# EAGLE board MyTinyCamel (EAGLE 6.5.0)
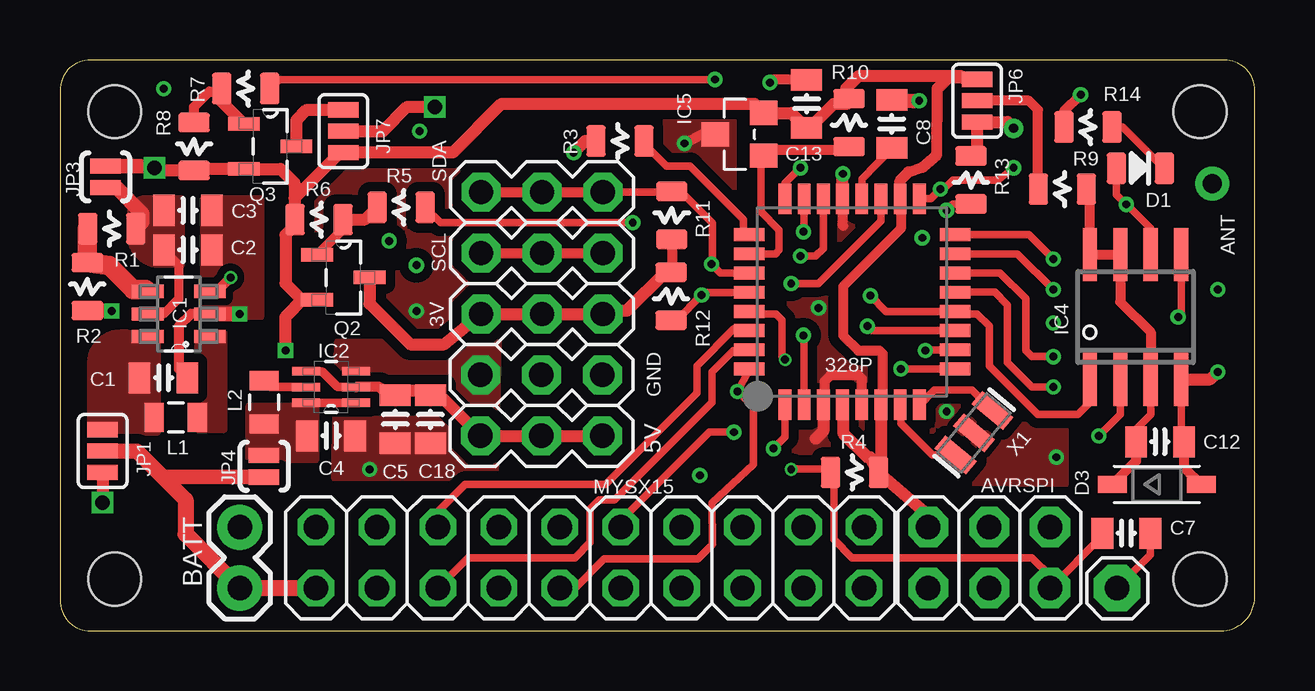
[diagram p0: board, top side]
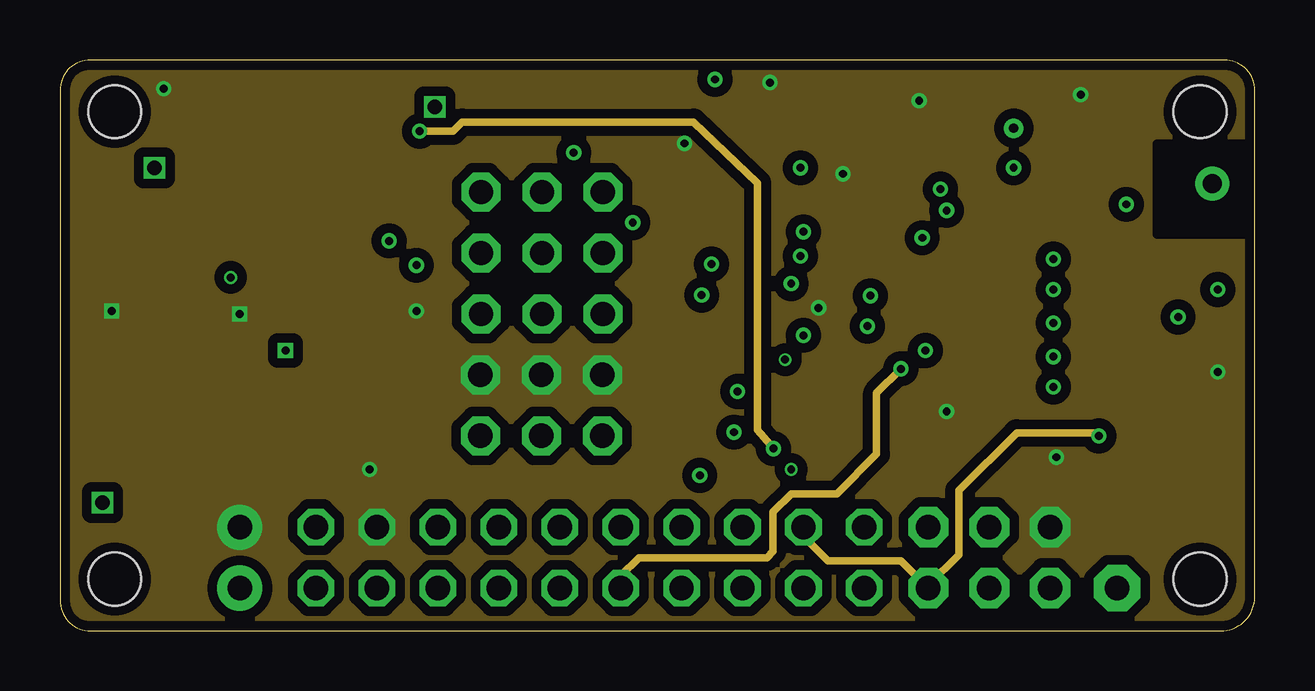
[diagram p1: board, inner layer Route2]
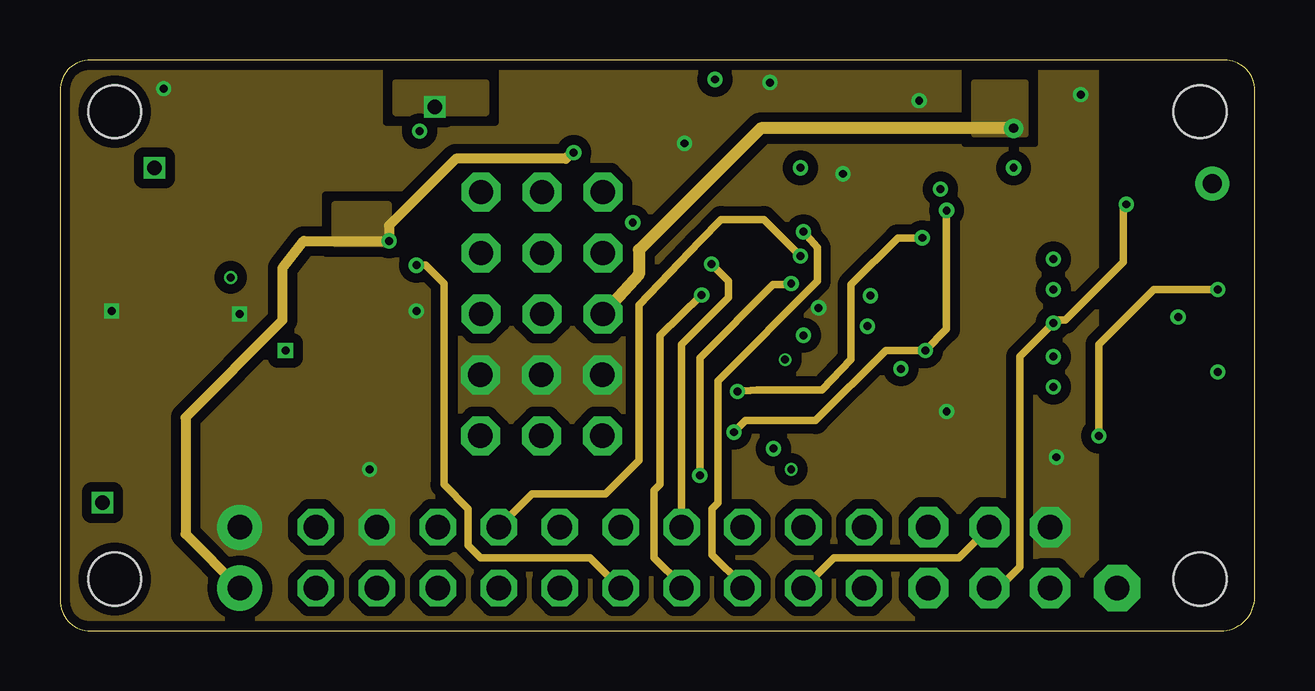
[diagram p2: board, inner layer Route15]
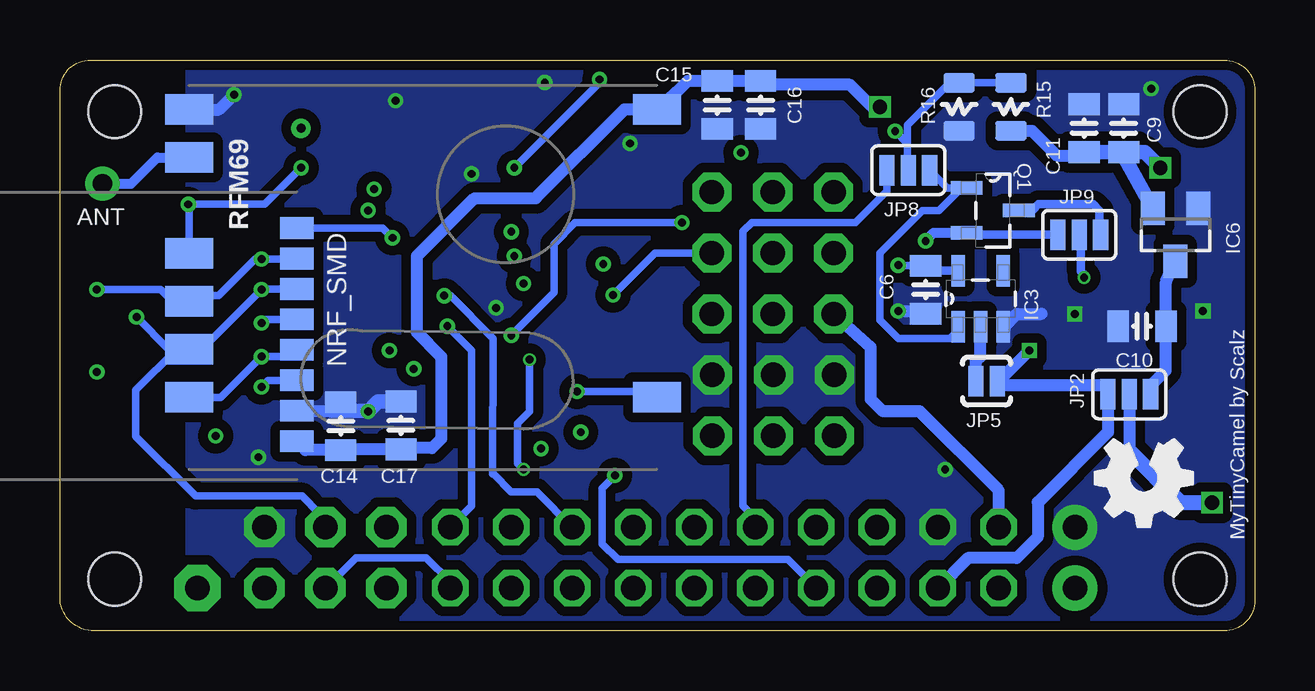
[diagram p3: board, bottom side, seen from below]

Size 49.8 x 23.81 mm. Coordinates in mm from the lower left corner, seen from the top.
Outline: 49.8,1.28 49.8,22.54 arc90 48.53,23.81 1.27,23.81 arc90 0,22.54 0,1.28 arc90 1.27,0.01 48.24,0.01 arc90 49.8,1.28
Copper layers (1*2*15*16): Top 0.035mm / dielectric 0.2mm / Route2 0.0175mm / dielectric 0.3mm / Route15 0.0175mm / dielectric 0.2mm / Bottom 0.035mm
Design rules "SeeedStudio_4layer_DRU_no_angle_20140221": minimum track width 8mil, minimum drill 12mil, track to track 8mil, track to pad 8mil, pad to pad 8mil, via to via 8mil, smd to smd 0mil, copper to edge 10mil, drill to drill 8mil, minimum pad ring 6mil, minimum via ring 4mil, stop-mask expansion 4mil, vias tented up to drill 100mil, thermal gap 10mil
Net classes: 1 power: width 0.381 mm, clearance 0.254 mm
Holes 2.2 mm at 2.28,21.65 47.52,21.65 2.28,2.16 47.52,2.16

## Footprints (pad centres in the part's own frame; a part is rotated, then mirrored left to right if it is on the bottom)
1X03 = drill 1.016 pad 1.626 octagon: 1 0,0; 2 2.54,0; 3 5.08,0
TQFP32-08 = smd 1.27 x 0.533: 1 -4.293,2.8; 2 -4.293,2; 3 -4.293,1.2; 4 -4.293,0.4; 5 -4.293,-0.4; 6 -4.293,-1.2; 7 -4.293,-2; 8 -4.293,-2.8; 17 4.293,-2.8; 18 4.293,-2; 19 4.293,-1.2; 20 4.293,-0.4; 21 4.293,0.4; 22 4.293,1.2; 23 4.293,2; 24 4.293,2.8 | smd 0.533 x 1.27: 9 -2.8,-4.293; 10 -2,-4.293; 11 -1.2,-4.293; 12 -0.4,-4.293; 13 0.4,-4.293; 14 1.2,-4.293; 15 2,-4.293; 16 2.8,-4.293; 25 2.8,4.293; 26 2,4.293; 27 1.2,4.293; 28 0.4,4.293; 29 -0.4,4.293; 30 -1.2,4.293; 31 -2,4.293; 32 -2.8,4.293
RFM12B-ANTENNA = drill 0.8 pad 1.422: P$1 0,0
2X03 = drill 1.016 pad 1.676 octagon: 1 -2.54,-1.27; 2 -2.54,1.27; 3 0,-1.27; 4 0,1.27; 5 2.54,-1.27; 6 2.54,1.27
1X02 = drill 1.016 pad 1.88: 1 0,0; 2 2.54,0
0805-CAP = smd 0.902 x 1.3: 1 -1,0; 2 1,0
0805-LED = smd 0.8 x 1.3: MINUS -1,0; PLUS 1,0
SOD-123 = smd 1.2 x 0.7: A 1.85,0; C -1.85,0
1X01 = drill 1.016 pad 1.93 octagon: 1 0,0
SOT95P270X145-6N = smd 1.321 x 0.559: 1 -1.295,0.94; 2 -1.295,0; 3 -1.295,-0.94; 4 1.295,-0.94; 5 1.295,0; 6 1.295,0.94
SOT65P210X110-6N = smd 1.168 x 0.356: 1 -1.041,0.66; 2 -1.041,0; 3 -1.041,-0.66; 4 1.041,-0.66; 5 1.041,0; 6 1.041,0.66
NCP302LSN20T1 = smd 1.321 x 0.559: CD 1.168,0.94; GND -1.168,-0.94; IN -1.168,0; NC 1.168,-0.94; RST -1.168,0.94
SO-08 = smd 0.6 x 2.2: 1 -1.905,-2.6; 2 -0.635,-2.6; 3 0.635,-2.6; 4 1.905,-2.6; 5 1.905,2.6; 6 0.635,2.6; 7 -0.635,2.6; 8 -1.905,2.6
SOT23 = smd 1.016 x 1.143: 1 -0.889,-1.016; 2 0.889,-1.016; 3 0,1.016
SOT23' = smd 1 x 1.4: 1 -0.95,-1.1; 2 0.95,-1.1; 3 0,1.1
SJ_3 = smd 0.635 x 1.27: 1 -0.889,0; 2 0,0; 3 0.889,0
SJ_2S-NO = smd 0.635 x 1.27: 1 -0.45,0; 2 0.45,0
0805 = smd 0.8 x 1.2: 1 -0.9,0; 2 0.9,0
2X10 = drill 1.016 octagon: 1 -11.43,-1.27; 2 -11.43,1.27; 3 -8.89,-1.27; 4 -8.89,1.27; 5 -6.35,-1.27; 6 -6.35,1.27; 7 -3.81,-1.27; 8 -3.81,1.27; 9 -1.27,-1.27; 10 -1.27,1.27; 11 1.27,-1.27; 12 1.27,1.27; 13 3.81,-1.27; 14 3.81,1.27; 15 6.35,-1.27; 16 6.35,1.27; 17 8.89,-1.27; 18 8.89,1.27; 19 11.43,-1.27; 20 11.43,1.27
NRF24L01+SMD_MODULE = smd 0.9 x 1.4: 3V -4.8,-9.6; CE -2.26,-9.6; CSN -0.99,-9.6; GND -3.53,-9.6; IRQ 4.09,-9.6; MISO 2.82,-9.6; MOSI 1.55,-9.6; SCK 0.28,-9.6
SOT95P237X112-3N = smd 1.321 x 0.559: 1 -1.092,0.94; 2 -1.092,-0.94; 3 1.092,0
0805-RES = smd 0.8 x 1.3: 1 -1,0; 2 1,0
RFM69W-MINPADS = smd 2 x 1.27: ANA 8,-5; DIO0 -11.5,5; GND 8,-7; MISO 8,1; MOSI 8,3; NSS 8,5; SCK 8,-1; VDD -11.5,-7
RESONATOR-SMD = smd 0.7 x 1.7: 1 -1.2,0; 2 0,0; 3 1.2,0

## Placement (x,y rotation side)
3V  [1X03]  17.55,13.22 0 top
5V  [1X03]  17.53,8.14 0 top
328P  ATMega-328  [TQFP32-08]  33.02,13.72 90 top
ANT  RFM12B_ANTENNA  [RFM12B-ANTENNA]  48.03,18.65 0 top
AVRSPI  AVRSPI  [2X03]  38.73,3.06 0 top
BATT  M02PTH  [1X02]  7.49,1.79 90 top
C1  4.7u  [0805-CAP]  4.32,10.55 0 top
C2  10n  [0805-CAP]  5.33,15.88 0 top
C3  [0805-CAP]  5.33,17.53 0 top
C4  10u  [0805-CAP]  11.3,8.14 0 top
C5  10u  [0805-CAP]  13.97,8.82 270 top
C6  33n  [0805-CAP]  13.72,14.23 270 bottom
C7  0.1  [0805-CAP]  44.45,4.07 180 top
C8  0.1  [0805-CAP]  34.67,21.14 90 top
C9  0.1  [0805-CAP]  5.46,20.96 90 bottom
C10  1u  [0805-CAP]  4.7,12.71 180 bottom
C11  10u  [0805-CAP]  7.11,20.96 90 bottom
C12  100n  [0805-CAP]  45.85,7.88 0 top
C13  100n  [0805-CAP]  31.11,21.98 270 top
C14  4u7  [0805-CAP]  38.1,8.54 270 bottom
C15  4u7  [0805-CAP]  22.4,21.93 90 bottom
C16  0.1u  [0805-CAP]  20.6,21.93 90 bottom
C17  0.1u  [0805-CAP]  35.59,8.57 270 bottom
C18  0.1u  [0805-CAP]  15.44,8.82 270 top
D1  LED0805  [0805-LED]  45.03,19.29 180 top
D3  BZT52H-B3V6  [SOD-123]  45.72,6.1 0 top
DTR  [1X01]  44.07,1.79 0 top
GND  [1X03]  17.53,10.68 0 top
IC1  MCP1640T-I/CHY  [SOT95P270X145-6N]  4.95,13.22 180 top
IC2  TPS61222DCKT  [SOT65P210X110-6N]  11.3,10.17 180 top
IC3  NCP302LSN20T1  [NCP302LSN20T1]  11.43,13.85 90 bottom
IC4  AT25DF512C-SSHN-B  [SO-08]  44.83,13.09 0 top
IC5  ATSHA204A  [SOT23]  28.32,20.71 90 top
IC6  MCP1703CB  [SOT23']  3.3,16.52 180 bottom
JP1  JUMPER-3SMD  [SJ_3]  1.78,7.5 270 top
JP2  JUMPER-3SMD  [SJ_3]  5.23,9.86 180 bottom
JP3  [SJ_2S-NO]  1.91,18.93 90 top
JP4  [SJ_2S-NO]  8.51,6.87 270 top
JP5  [SJ_2S-NO]  11.18,10.42 0 bottom
JP6  JUMPER-3SMD  [SJ_3]  38.23,22.11 90 top
JP7  JUMPER-3SMD  [SJ_3]  11.81,20.84 270 top
JP8  JUMPER-3SMD  [SJ_3]  14.44,19.21 180 bottom
JP9  JUMPER-3SMD  [SJ_3]  7.32,16.52 180 bottom
L1  4.7uH  [0805]  4.83,8.9 0 top
L2  4.7uH  [0805]  8.51,9.53 90 top
MYSX15  MYSXConnector 1.5  [2X10]  22.1,3.06 0 top
NRF_SMD  NRF24L01+SMD_MODULE  [NRF24L01+SMD_MODULE]  49.53,12.71 90 bottom
Q1  cj2305  [SOT95P237X112-3N]  10.92,17.53 0 bottom
Q2  SI2399DS-T1-GE3  [SOT95P237X112-3N]  11.81,14.74 0 top
Q3  SI2399DS-T1-GE3  [SOT95P237X112-3N]  8.76,20.2 0 top
R1  976k  [0805-RES]  2.16,16.77 0 top
R2  562k  [0805-RES]  1.14,14.36 270 top
R3  [0805-RES]  23.34,20.43 0 top
R4  10k  [0805-RES]  33.12,6.61 0 top
R5  100  [0805-RES]  14.22,17.66 180 top
R6  10k  [0805-RES]  10.79,17.15 180 top
R7  100  [0805-RES]  7.75,22.61 180 top
R8  10k  [0805-RES]  5.59,20.2 270 top
R9  100  [0805-RES]  41.78,18.42 180 top
R10  56k  [0805-RES]  32.89,21.19 90 top
R11  4k7  [0805-RES]  25.5,17.33 270 top
R12  4k7  [0805-RES]  25.48,13.95 90 top
R13  10k  [0805-RES]  37.97,18.8 90 top
R14  330  [0805-RES]  42.85,21.01 180 top
R15  10k  [0805-RES]  10.16,21.85 270 bottom
R16  10k  [0805-RES]  12.32,21.85 270 bottom
RFM69  RFM69  [RFM69W-MINPADS]  36.42,14.74 180 bottom
SCL  [1X03]  17.55,15.76 0 top
SDA  [1X03]  17.55,18.3 0 top
X1  8 MHz  [RESONATOR-SMD]  38.1,8.26 50.2 top

## Library data of the parts
3V 5V BATT GND SCL SDA = SparkFun-Connectors
328P ANT C1-C18 D1 R1-R16 RFM69 = LowPowerLab
AVRSPI MYSX15 = pinhead
D3 DTR = adafruit
IC1 = pmo_lib; MPN: MCP1640BT-I/CHY; OC_FARNELL: 1800207; OC_NEWARK: 73R3625; PACKAGE: SOT-6; SUPPLIER: Microchip
IC2 = pmo_lib; MPN: TPS61222DCKT; OC_FARNELL: 1755643; OC_NEWARK: 94T5101; PACKAGE: SC70-6; SUPPLIER: Texas Instruments
IC3 NRF_SMD = pmo_lib
IC4 = microchip; MF: MICROCHIP; MPN: 25AA080/SN; OC_FARNELL: 1816072; OC_NEWARK: 92C7351
IC5 = Sensor_tbowmo
IC6 = linear
JP1-JP9 L1 L2 = SparkFun-Passives
Q1-Q3 = pmo_lib; MPN: SI2399DS-T1-GE3; OC_FARNELL: 2056681; OC_NEWARK: 64T4058; PACKAGE: SOT-23-3; SUPPLIER: VISHAY SILICONIX
X1 = SparkFun

## Nets
A0: 328P.23 MYSX15.15
A1: 328P.24 R7.1
A2: 328P.25 R3.2
A3: 328P.26 IC5.1 R10.1
ADC1: 328P.19 MYSX15.7
ADC2: 328P.22 MYSX15.8
AREF: 328P.20 C8.1
D2: 328P.32 MYSX15.9 NRF_SMD.IRQ RFM69.DIO0
D3: 328P.1 JP8.2 R15.1 R16.1
D4: 328P.2 R5.1
D5: 328P.9 C6.1 IC3.CD MYSX15.11
D6: 328P.10 MYSX15.12 R13.1
D7: 328P.11 MYSX15.20
D9: 328P.13 NRF_SMD.CE
D10: 328P.14 NRF_SMD.CSN RFM69.NSS
DTR: C7.1 DTR.1
EN_BOOST: IC1.3 JP9.2
FLASH_CSN: 328P.12 IC4.1 MYSX15.16
GND: 328P.3 328P.5 328P.21 AVRSPI.6 BATT.2 C1.2 C2.2 C3.2 C4.2 C5.2 C6.2 C8.2 C9.2 C10.2 C11.2 C12.2 C13.1 C14.1 C15.1 C16.1 C17.1 C18.2 D3.A GND.1 GND.2 GND.3 IC1.2 IC2.3 IC3.GND IC4.4 IC5.3 IC6.1 MYSX15.4 NRF_SMD.GND R2.2 R14.2 R16.2 RFM69.GND X1.2
INT2: JP8.3 MYSX15.10
INT_BOOST: IC3.RST JP8.1 Q1.1
MISO: 328P.16 AVRSPI.1 IC4.2 MYSX15.18 NRF_SMD.MISO RFM69.MISO
MOSI: 328P.15 AVRSPI.4 IC4.5 MYSX15.17 NRF_SMD.MOSI RFM69.MOSI
N$1: IC1.1 L1.2
N$2: ANT.P$1 RFM69.ANA
N$3: IC3.IN JP5.1
N$4: IC1.4 R1.1 R2.1
N$5: JP6.2 R9.2
N$6: C12.1 D3.C IC4.3 IC4.7 IC4.8 R9.1
N$7: Q2.1 R5.2 R6.1
N$8: C2.1 C3.1 IC1.5 JP3.1 R1.2
N$9: 328P.7 X1.1
N$10: IC2.5 L2.2
N$12: D1.MINUS R14.1
N$13: C4.1 IC2.1 IC2.6 JP4.1 L2.1
N$15: JP1.3 JP2.2
N$18: Q3.1 R7.2 R8.1
N$21: 328P.8 X1.3
Q_NCP: JP9.1 Q1.3
RST: 328P.29 AVRSPI.5 C7.2 R4.1
RX: 328P.30 MYSX15.6
SCK: 328P.17 AVRSPI.3 D1.PLUS IC4.6 MYSX15.19 NRF_SMD.SCK RFM69.SCK
SCL: 328P.28 MYSX15.13 R12.1 SCL.1 SCL.2 SCL.3
SDA: 328P.27 MYSX15.14 R11.1 SDA.1 SDA.2 SDA.3
TX: 328P.31 MYSX15.5
V+5: 5V.1 5V.2 5V.3 C5.1 C18.1 IC2.2 IC2.4
VCC: 328P.4 328P.6 328P.18 AVRSPI.2 C9.1 C11.1 C13.2 IC5.2 IC6.2 JP2.3 JP3.2 JP5.2 JP6.3 JP7.3 MYSX15.3 Q2.2 Q3.2 R4.2 R6.2 R8.2 R10.2 R15.2
VCC_RF: JP7.1 Q3.3
VCC_SENSORS: 3V.1 3V.2 3V.3 JP6.1 MYSX15.2 Q2.3 R11.2 R12.2 R13.2
VCCRF: C14.2 C15.2 C16.2 C17.2 JP7.2 NRF_SMD.3V RFM69.VDD
VIN: BATT.1 JP1.2 JP4.2 JP9.3 MYSX15.1 Q1.2 R3.1
VIN2: C1.1 IC1.6 JP1.1 L1.1
VREG [power]: C10.1 IC6.3 JP2.1

## Tracks (layer width: path | path; a pad name or v marks a point on that pad's centre or on a via)
A0  (via drill 0.33 pad 0.64)
  Top 0.305: 328P.23 31.02,16.68 v30.99,16.64
  Route15 0.305: MYSX15.15 28.45,1.91 27.18,3.18 27.18,5.09 27.43,5.34 27.43,10.42 31.57,14.59 31.57,15.98 v30.99,16.64
A1  (via drill 0.33 pad 0.64)
  Top 0.305: 328P.24 30.22,18.67 v30.86,19.31 | v27.3,22.99 9.13,22.99 R7.1
  Bottom 0.305: v27.3,22.99 27.3,22.87 v30.86,19.31
A2
  Top 0.305: 28.61,16.64 328P.25 28.5,16.75 28.5,17.15 26.26,19.39 25.27,19.39 24.34,20.32 R3.2
A3
  Top 0.305: 328P.26 29.81,15.72 29.97,15.88 29.97,16.72 29.21,17.48 29.21,20.07 IC5.1
  Top 0.406: IC5.1 29.59,19.82 29.84,20.07 32.88,20.07 R10.1
ADC1  (via drill 0.33 pad 0.64)
  Top 0.305: 328P.19 34.22,17.08 31.62,14.49 v30.48,14.49
  Route15 0.305: v26.67,6.48 26.67,11.39 29.72,14.43 30.43,14.43 v30.48,14.49
  Bottom 0.305: MYSX15.7 18.29,1.81 19.46,2.98 26.54,2.98 27.2,3.64 27.2,5.95 v26.67,6.48
ADC2  (via drill 0.33 pad 0.64)
  Top 0.305: 328P.22 31.82,15.95 31.5,15.63 v30.86,15.63
  Route15 0.305: MYSX15.8 19.68,5.72 22.73,5.72 24.13,7.12 24.13,13.6 26.67,16.26 27.56,17.15 29.34,17.15 v30.86,15.63
AREF
  Top 0.305: 328P.20 33.42,18.84 C8.1
D2  (via drill 0.33 pad 0.64)
  Top 0.305: 328P.32 28.73,10.85 v28.25,9.99 28.91,9.35 28.91,6.94 27.18,5.34 27.2,3.61 26.59,3 22.68,3 21.46,1.79 MYSX15.9
  Route15 0.305: v35.94,16.39 34.92,16.39 32.97,14.43 32.97,11.31 31.75,10.04 29.06,10.04 v28.25,9.99
  Bottom 0.305: RFM69.DIO0 25.4,9.74 | NRF_SMD.IRQ 36.35,16.8 v35.94,16.39 | 25.65,9.49 25.4,9.74 | 25.4,9.74 25.4,9.46 | 25.3,10.12 25.17,9.99 | 24.64,9.45 RFM69.DIO0 | v28.25,9.99 25.17,9.99 | 25.17,9.99 RFM69.DIO0
D3  (via drill 0.33 pad 0.64)
  Top 0.305: 30.22,9.15 30.22,8.08 v29.74,7.6
  Top 0.406: 328P.1 30.22,9.15
  Route2 0.305: v14.99,20.84 16.38,20.84 16.76,21.22 26.42,21.22 29.08,18.68 29.08,8.39 v29.74,7.6
  Bottom 0.305: 14.48,20.33 14.48,21.09 12.72,22.85 R16.1 R15.1 | 14.48,20.33 14.48,19.25 JP8.2 | v14.99,20.84 14.48,20.33
D4  (via drill 0.33 pad 0.64)
  Top 0.305: 15.37,17.15 R5.1 15.86,17.03 v23.88,17.03 | 30.99,9.4 328P.2 31.02,12.29 v30.99,12.33
  Bottom 0.305: v30.99,12.33 29.21,14.1 29.21,16.14 28.32,17.03 v23.88,17.03
D5  (via drill 0.33 pad 0.64)
  Top 0.305: 328P.9 35.95,10.92 v35.05,10.93
  Route2 0.305: MYSX15.11 23.37,2.29 24.13,3.06 29.46,3.06 29.72,3.31 29.72,4.96 30.48,5.72 32.38,5.72 34.04,7.37 34.04,9.91 v35.05,10.93
  Route15 0.305: v14.86,15.25 15.24,15.25 16,14.49 16,6.1 17.02,5.09 17.02,3.56 17.53,3.06 22.1,3.06 MYSX15.11
  Bottom 0.305: C6.1 14.84,15.23 v14.86,15.25
  Bottom 0.356: IC3.CD 13.5,15.02 C6.1
D6  (via drill 0.33 pad 0.64)
  Top 0.305: 328P.10 36.1,11.72 v36.07,11.69 | R13.1 37.23,17.8 v36.96,17.53 | v28.09,8.29 27.08,8.29 23.75,4.96 23.75,4.71 MYSX15.12
  Route15 0.305: v36.96,17.53 36.96,12.58 v36.07,11.69 34.42,11.69 31.5,8.77 28.57,8.77 v28.09,8.29
D7  (via drill 0.33 pad 0.64)
  Top 0.305: 328P.11 33.84,12.52 v33.66,12.71
  Bottom 0.305: MYSX15.20 32.64,5.21 32.64,11.69 v33.66,12.71
D9  (via drill 0.33 pad 0.64)
  Top 0.305: 37.29,14.1 328P.13 38.97,14.12 39.5,13.6 39.5,11.18 40.51,10.17 v41.4,10.17
  Bottom 0.305: 39.65,10.17 NRF_SMD.CE 41.12,10.45 v41.4,10.17
D10  (via drill 0.33 pad 0.64)
  Top 0.305: 328P.14 39.19,14.92 40.26,13.85 40.26,11.69 40.51,11.44 v41.4,11.44
  Bottom 0.305: 39.9,11.69 NRF_SMD.CSN 40.21,11.44 v41.4,11.44 43.1,9.74 RFM69.NSS
DTR
  Top 0.305: C7.1 45.45,3.17 DTR.1
EN_BOOST  (via drill 0.33)
  Top 0.406: IC1.3 6.53,14.16 v7.11,14.74
  Bottom 0.356: v7.11,14.74 7.11,14.87 7.24,14.99 7.24,16.44 JP9.2
FLASH_CSN  (via drill 0.33 pad 0.64)
  Top 0.305: 328P.12 37.42,13.22 38.23,13.22 38.73,12.71 38.73,11.06 40.77,9.02 42.42,9.02 42.93,9.53 IC4.1 | 328P.12 34.44,13.32 v33.78,13.98 | 37.33,13.34 328P.12
  Bottom 0.305: 28.45,4.45 MYSX15.16 29.92,5.8 30.99,5.8 31.74,6.55 31.76,6.55 31.75,12.2 33.53,13.98 v33.78,13.98
GND  (via drill 0.33 pad 0.64)
  Top 0.305: IC4.4 46.74,8.25 C12.2
  Top 0.356: 31.88,9.49 328P.3
  Top 0.406: IC1.2 5.46,13.22 4.95,12.71 4.95,10.91 C1.2 | 328P.5 33.42,10.53 33.27,10.68 32.13,10.68 31.88,10.42 31.88,9.49 | 328P.21 32.62,16.92 32.64,16.9 | IC5.3 26.8,20.71 v26.04,20.33 | C13.1 29.7,22.98 v29.59,22.87 | C12.2 46.85,6.83 D3.A | R14.2 41.85,21.66 v42.55,22.36
  Top 0.508: 328P.21 32.62,19.04 v32.64,19.06 | 328P.3 31.82,8.33 31.5,8.01 | IC4.4 47.95,10.49 v48.26,10.8
  Top 0.61: IC1.2 v7.49,13.22 | C8.2 35.58,22.09 v35.81,22.11 | R2.2 2.14,13.36 v2.16,13.34
  Bottom 0.406: 10.39,12.58 IC3.GND
  Bottom 0.508: v14.86,13.34 13.83,13.34 C6.2 | IC3.GND 10.44,12.68 9.91,13.22 8.89,13.22 | RFM69.GND 43.16,21.74 v42.55,22.36 | NRF_SMD.GND 38.46,9.18 C14.1
  Bottom 0.61: C17.1 36.54,9.57 v36.96,9.15 36.98,9.18 38.46,9.18
  other vias: 31.62,13.47 12.9,6.74 41.53,7.25 4.32,22.61
  pour Route2 (isolate 0.406, no thermals): 1.27,23.76 48.51,23.76 arc-90 49.78,22.49 49.78,1.28 arc-90 48.51,0.01 1.27,0.01 arc-90 0,1.28 0,22.49 arc-90
  pour Top (isolate 0.305, no thermals): 5.97,18.04 8.38,18.04 8.38,13.09 5.97,13.09
  pour Bottom (isolate 0.406, no thermals): 44.45,0.01 1.27,0.01 arc-90 0,1.28 0,22.49 arc-90 1.27,23.76 44.45,23.76
  pour Top (isolate 0.406, no thermals): 11.56,12.07 18.29,12.07 18.16,6.36 11.43,6.36
  pour Top (isolate 0.406): 27.94,6.23 27.94,18.8 41.91,18.68 41.91,6.1
  pour Route15 (isolate 0.406, rank 6, no thermals): 43.18,0.01 1.27,0.01 arc-90 0,1.28 0,22.49 arc-90 1.27,23.76 43.18,23.76
  pour Top (isolate 0.406, no thermals): 9.27,23.76 28.07,23.76 28.07,12.71 9.27,12.71
INT2
  Bottom 0.305: MYSX15.10 20.83,4.71 21.34,5.21 21.34,16.67 20.95,17.03 16.64,17.03 15.33,18.33 JP8.3
INT_BOOST
  Bottom 0.305: Q1.1 12.22,18.47 | 12.22,18.47 13.16,17.53 13.84,17.53 15.62,15.76 15.62,12.96 14.86,12.2 12.7,12.2 12.37,12.53 IC3.RST | 12.22,18.47 12.81,18.47 JP8.1
MISO  (via drill 0.33 pad 0.64)
  Top 0.305: IC4.2 44.2,9.02 v43.31,8.14 | 328P.16 40.38,16.52 v41.4,15.5
  Route2 0.305: MYSX15.18 30.99,3.94 32,2.93 35.05,2.93 AVRSPI.1 36.2,1.91 37.47,3.18 37.47,5.85 39.88,8.26 43.18,8.26 v43.31,8.14
  Route15 0.305: v48.26,14.23 45.59,14.23 43.31,11.95 v43.31,8.14
  Bottom 0.305: v48.26,14.23 45.59,14.23 45.1,13.74 RFM69.MISO 44.08,13.98 43.18,13.98 41.66,15.5 v41.4,15.5 39.96,15.5 NRF_SMD.MISO
MOSI  (via drill 0.33 pad 0.64)
  Top 0.305: IC4.5 46.74,13.22 v46.61,13.09 | 328P.15 39.91,15.72 v41.4,14.23
  Route15 0.305: AVRSPI.4 37.47,3.06 32.26,3.06 MYSX15.17
  Bottom 0.305: 44.93,11.74 RFM69.MOSI 44.02,11.44 43.94,11.44 43.56,11.82 43.56,12.07 v41.4,14.23 41.38,14.26 NRF_SMD.MOSI | 44.93,11.74 45.26,11.74 v46.61,13.09 46.48,12.96 | 44.93,11.74 46.63,10.04 46.63,8.11 44.15,5.62 39.7,5.62 38.99,4.91 38.99,4.33 AVRSPI.4
N$1
  pour Top (isolate 0.381, no thermals): 6.86,12.45 5.71,12.45 5.71,8.39 6.86,8.39
N$2
  Bottom 0.406: ANT.P$1 46.84,18.65 45.74,19.74 RFM69.ANA
N$3
  Bottom 0.508: JP5.1 11.63,11.24 11.43,11.44 IC3.IN
N$4
  Top 0.406: 3.58,14.23 IC1.4
  Top 0.813: 3.58,14.23 3.05,14.23 2.05,15.23 R2.1 1.14,16.76 R1.1
N$5
  Top 0.305: 40.89,18.53 R9.2
  Top 0.406: 40.89,18.53 40.89,18.8 40.77,18.93 40.77,21.72 40.39,22.11 JP6.2
N$6
  Top 0.305: C12.1 44.85,8.41 45.47,9.02 IC4.3
  Top 0.406: R9.1 42.93,18.28 IC4.8 IC4.7 44.2,13.72 45.47,12.45 IC4.3 | C12.1 44.85,7.08 D3.C
N$7
  Top 0.406: R6.1 11.79,16.76 Q2.1
  Top 0.508: R6.1 12.72,17.15 R5.2
N$8
  Top 0.381: C2.1 4.33,15.87 4.95,15.25 4.95,13.85 4.32,13.22 IC1.5
  Top 0.61: JP3.1 2.35,18.48 3.43,17.41 3.43,17.04 R1.2
  pour Top (no thermals): 2.92,16.52 2.92,17.41 arc-90 3.56,18.04 5.08,18.04 5.08,15.25 4.19,15.25 arc-90
N$9
  Top 0.305: X1.1 36.35,7.34 35.05,8.64 35.05,9.4
  Top 0.356: 35.05,9.4 328P.7
N$10
  Top 0.356: IC2.5 8.77,10.17 L2.2
N$11
  cutout Route2 (no thermals): 49.53,20.33 45.72,20.33 45.72,16.52 49.53,16.52
N$12
  Top 0.305: R14.1 44.31,21.01 D1.MINUS
N$13
  Top 0.356: IC2.1 IC2.6
  pour Top (isolate 0.406, no thermals): 7.87,9.41 10.67,9.41 10.67,7.12 7.87,7.12
N$15  (via drill 0.6)
  Top 0.508: JP1.3 v1.78,5.34
  Bottom 0.508: JP2.2 5.23,7.5
  Bottom 0.635: v1.78,5.34 3.07,5.34 5.23,7.5
N$18
  Top 0.406: R8.1 5.59,21.85 6.22,22.49 6.62,22.49 R7.2
  Top 0.508: R7.2 6.75,22.06 Q3.1
N$21
  Top 0.305: 328P.8 35.84,9.43 36.45,10.04 38.01,10.04 X1.3
  Top 0.356: X1.3 38.58,9.18
Q_NCP
  Bottom 0.356: Q1.3 9.27,17.53 9.02,17.79 6.73,17.79 6.48,17.53 6.48,16.57 JP9.1
RST  (via drill 0.33)
  Top 0.305: 328P.29 28.29,13.32 | C7.2 43.45,3.96 AVRSPI.5 41.27,2.29 40.51,3.06 33.02,3.06 32.26,3.82 32.26,6.75 | 328P.29 28.62,13.22 29.84,13.22 30.1,12.96 30.1,11.44 v30.23,11.31 | 32.26,6.75 R4.1 | 28.75,13.34 328P.29 | 32.26,6.75 30.5,6.75 v30.48,6.74
  Bottom 0.305: v30.23,11.31 30.23,9.15 30.73,8.64 30.73,6.99 v30.48,6.74
RX
  Top 0.305: MYSX15.6 15.75,4.96 16.89,6.1 22.73,6.1 26.54,9.91 26.54,11.06 28.07,12.58 28.67,12.58 328P.30
SCK  (via drill 0.33 pad 0.64)
  Top 0.305: 328P.17 36.3,18.02 v36.7,18.42 36.83,18.42 37.21,18.8 39.12,18.8 v39.75,19.31 | IC4.6 45.47,16.77 v44.45,17.79 44.03,18.2 D1.PLUS
  Route15 0.305: v44.45,17.79 44.32,17.66 44.32,15.37 41.91,12.96 41.53,12.96 v41.4,12.83 40.01,11.44 40.01,2.67 39.12,1.79 AVRSPI.3
  Bottom 0.305: 44.32,17.66 v44.45,17.79 | RFM69.SCK 44.42,17.76 v44.45,17.79 | NRF_SMD.SCK 41.25,12.99 v41.4,12.83 | v44.45,17.79 41.27,17.79 v39.75,19.31 | MYSX15.19 33.53,2.04 34.54,3.06 37.47,3.06 AVRSPI.3
SCL  (via drill 0.33 pad 0.64)
  Top 0.305: 328P.28 28.71,14.1 26.85,14.1 v26.75,14 25.7,12.95 R12.1
  Top 0.406: SCL.1 SCL.2 SCL.3
  Route15 0.305: MYSX15.13 25.91,1.91 24.77,3.06 24.77,5.85 25.02,6.1 25.02,12.33 v26.75,14
  Bottom 0.305: SCL.3 24.99,15.76 v26.75,14
SDA  (via drill 0.33 pad 0.64)
  Top 0.305: 328P.27 27.53,14.92 v27.15,15.3 27.2,15.35 27.2,17 25.87,18.33 R11.1 25.47,18.3 SDA.3
  Top 0.406: SDA.1 SDA.2 SDA.3
  Route15 0.305: MYSX15.14 25.91,11.95 27.86,13.9 27.86,14.59 v27.15,15.3
TX
  Top 0.305: 15.88,1.79 MYSX15.5 17.02,3.06 21.46,3.06 22.1,3.69 22.1,5.09 22.48,5.47 23.11,5.47 27.18,9.53 27.18,10.8 28.07,11.69 28.7,11.69 328P.31
V+5
  Top 0.356: IC2.4 10.92,10.83 11.58,10.17 IC2.2
  Top 0.406: C5.1 13.48,10.02 13.34,10.17 IC2.2
  Top 0.508: C5.1 14.37,10.02 15.24,10.02 C18.1 15.84,9.82 5V.1 5V.2 5V.3
VCC  (via drill 0.33 pad 0.64, 0.6)
  Top 0.305: 36.96,22.99 JP6.3
  Top 0.406: 9.79,17.52 R6.2 9.79,16.91 | 10.03,13.85 10.16,13.85 | 10.67,13.85 Q2.2 | 328P.18 35.05,17.98 35.05,16.77 32.64,14.36 32.64,12.33 33.27,11.69 34.16,11.69 34.29,11.56 34.29,9.5 328P.6 | 32.64,9.41 328P.4 | 32.89,22.23 R10.2 32.75,22.09 | C13.2 30.84,20.98
  Top 0.457: 36.58,22.61 36.55,19.84 35.97,19.34 35.36,19.13 35.02,18.77 328P.18
  Top 0.508: 9.79,16.91 9.4,16.52 9.4,14.49 10.03,13.85 | 10.67,13.85 10.16,13.85 9.4,13.09 v9.4,11.69 | R8.2 3.67,19.2 v3.94,19.31 | 36.58,22.61 36.96,22.99 | AVRSPI.2 36.2,4.82 R4.2 | 328P.6 34.22,6.94 R4.2 | 32.64,9.41 32.64,8.26 33.66,7.25 33.77,7.25 R4.2 | 5.14,19.26 R8.2 | 9.78,18.04 9.78,18.68 9.2,19.26 Q3.2 5.73,19.26 arc45 R8.2 | 9.78,18.04 9.78,17.17 R6.2 | 9.78,18.04 11.68,19.95 JP7.3 16.38,19.95 18.41,21.98 28.96,21.98 IC5.2 30.5,21.6 C13.2 31.26,20.98 32.26,21.98 32.78,21.98 R10.2 32.77,22.22 32.77,22.61 33.27,23.12 37.59,23.12 37.72,22.99 JP6.3
  Top 0.61: JP3.2 3.36,19.38 v3.94,19.31
  Bottom 0.406: JP5.2 10.67,10.42
  Bottom 0.508: 10.67,10.42 v9.4,11.69 | JP5.2 10.55,10.24 6.35,10.24 6.12,10.02 JP2.3 6.12,8.29 9.04,5.37 9.04,3.92 9.92,3.04 11.95,3.04 MYSX15.3 | R15.2 9.29,20.85 8.26,19.82 7.25,19.82 C11.1
  Bottom 0.61: C11.1 C9.1 | IC6.2 5.52,19.9 C9.1 | C9.1 4.59,19.96 v3.94,19.31
VCC_RF
  Top 0.508: Q3.3 9.86,21.29 10.29,21.72 JP7.1
VCC_SENSORS  (via drill 0.38 pad 0.81)
  Top 0.406: R11.2 25.5,14.98 R12.2 25.23,14.95 | 22.76,13.34 3V.3
  Top 0.508: Q2.3 12.9,13.65 14.61,11.95 16,11.95 3V.1 3V.2 3V.3 | R13.2 38.23,20.06 JP6.1 39.5,21.22 v39.75,20.96 | 25.23,14.95 23.62,13.34 22.76,13.34
  Route15 0.508: v39.75,20.96 29.21,20.96 24.13,15.88 24.13,14.87 3V.3
  Bottom 0.508: MYSX15.2 10.67,5.85 13.97,9.15 15.49,9.15 16,9.66 16,11.82 3V.1
  pour Route15 (isolate 0.457): 38.1,22.87 38.1,20.71 40.26,20.71 40.26,22.87
VCCRF  (via drill 0.6)
  Top 0.508: JP7.2 13.46,20.84 14.48,21.85 v15.62,21.85
  Bottom 0.508: v15.62,21.85 15.88,21.78 16.87,22.77 20.44,22.77 C16.2 C15.2 23.63,22.93 23.95,22.61 RFM69.VDD 26.27,21.74 29.97,18.04 32.51,18.04 34.92,15.63 34.92,12.45 33.91,11.44 33.91,8.01 34.29,7.63 35.52,7.63 C17.2 38.08,7.57 C14.2 39.56,7.54 NRF_SMD.3V
  pour Route15 (isolate 0.406, no thermals): 13.97,22.87 13.97,21.6 17.78,21.6 17.78,22.87
VIN  (via drill 0.33 pad 0.64)
  Top 0.508: R3.1 21.89,20.43 v21.41,19.95
  Top 0.61: JP4.2 4.29,6.42 4.01,6.69
  Top 0.635: JP1.2 3.2,7.5 4.01,6.69 5.23,5.47
  Top 0.66: 5.23,5.47 5.23,4.05 BATT.1 MYSX15.1
  Route15 0.406: BATT.1 5.23,4.05 5.23,8.9 9.27,12.96 9.27,15.12 10.16,16.26 v13.72,16.26 13.72,16.9 16.51,19.69 21.08,19.69 21.34,19.95 v21.41,19.95
  Bottom 0.356: JP9.3 11.94,16.52 Q1.2
  Bottom 0.406: Q1.2 13.39,16.59 v13.72,16.26
  pour Route15 (isolate 0.508): 11.43,17.79 11.43,16.14 13.72,16.14 13.72,17.79
VIN2
  pour Top (isolate 0.406, no thermals): 1.27,8.26 1.27,11.18 arc-90 2.54,12.45 4.06,12.45 4.06,8.26
VREG
  Bottom 0.508: C10.1 3.7,14.54 IC6.3 | 3.68,12.69 C10.1 | JP2.1 4.34,10.22 3.71,10.85 C10.1

## Text on the board
tPlace: ANT
bPlace: ANT | MyTinyCamel by Scalz